# Altium PCB BDS_NBIOT.PcbDoc
Units mil, origin at the board's own origin, x right, y up, seen from the top; angles counter-clockwise.
Board outline 3780 x 2275 mil, 2 copper layers (Top Layer, Bottom Layer); 72 components, 60 nets, 272 pads, 41 vias.
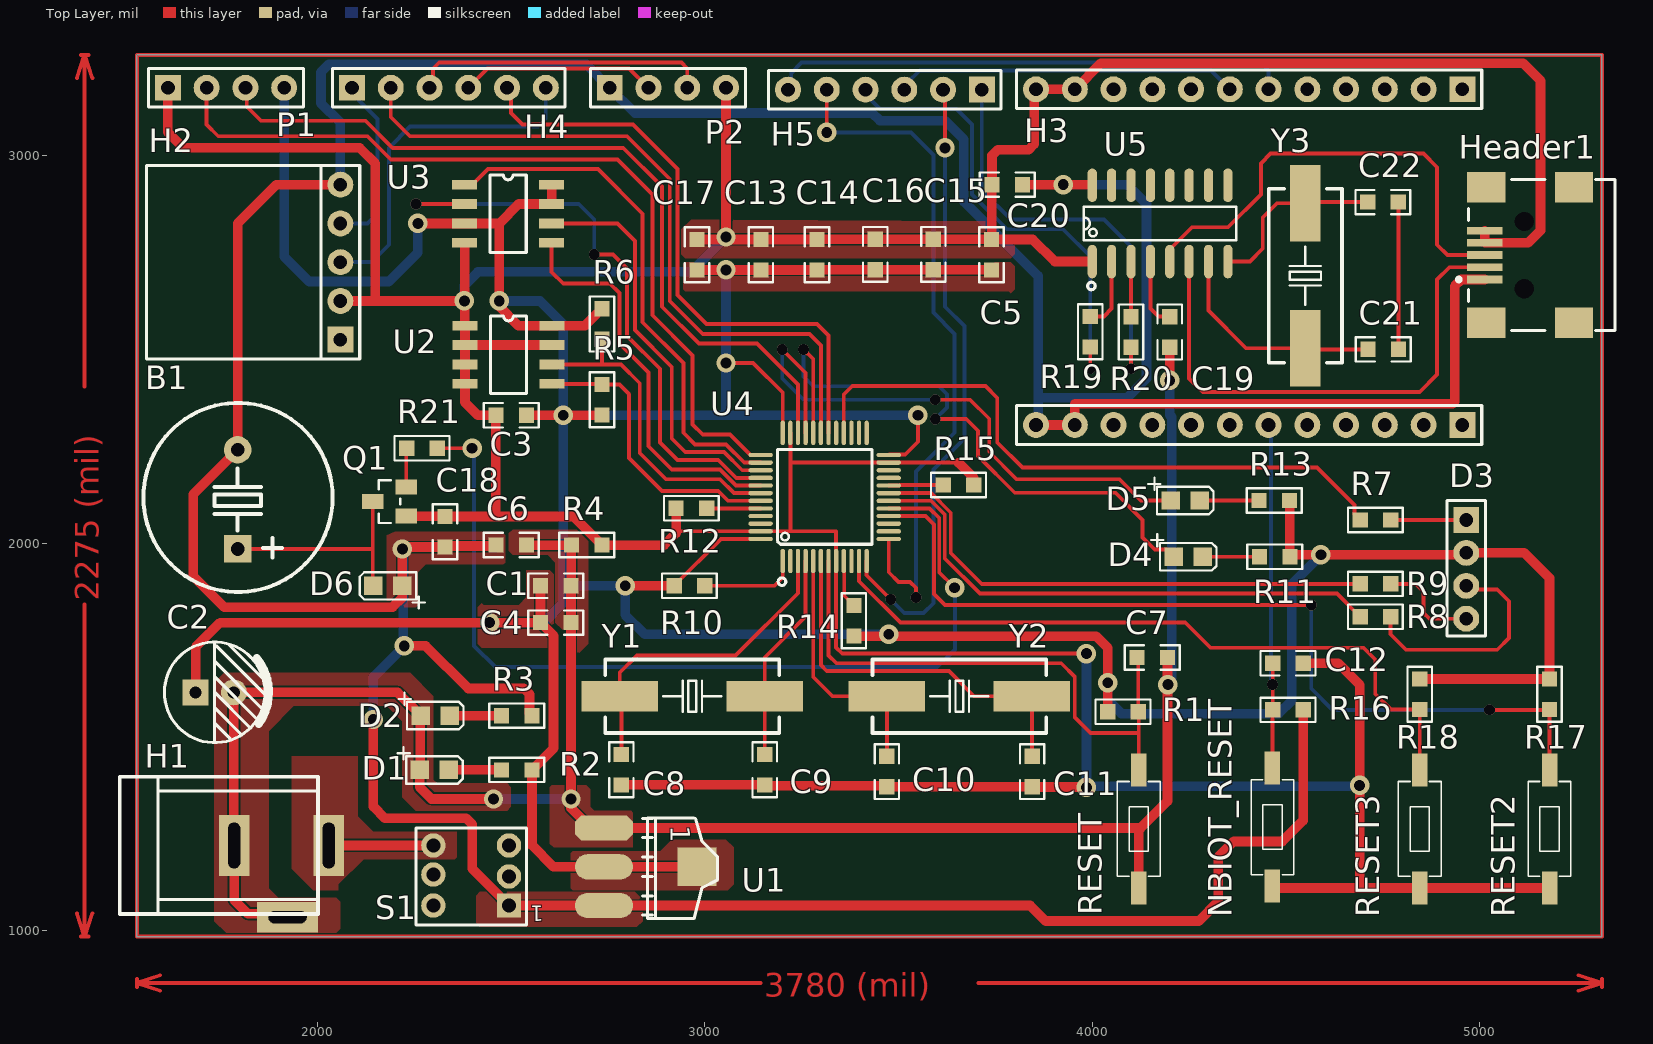
[diagram p0: Top Layer view]
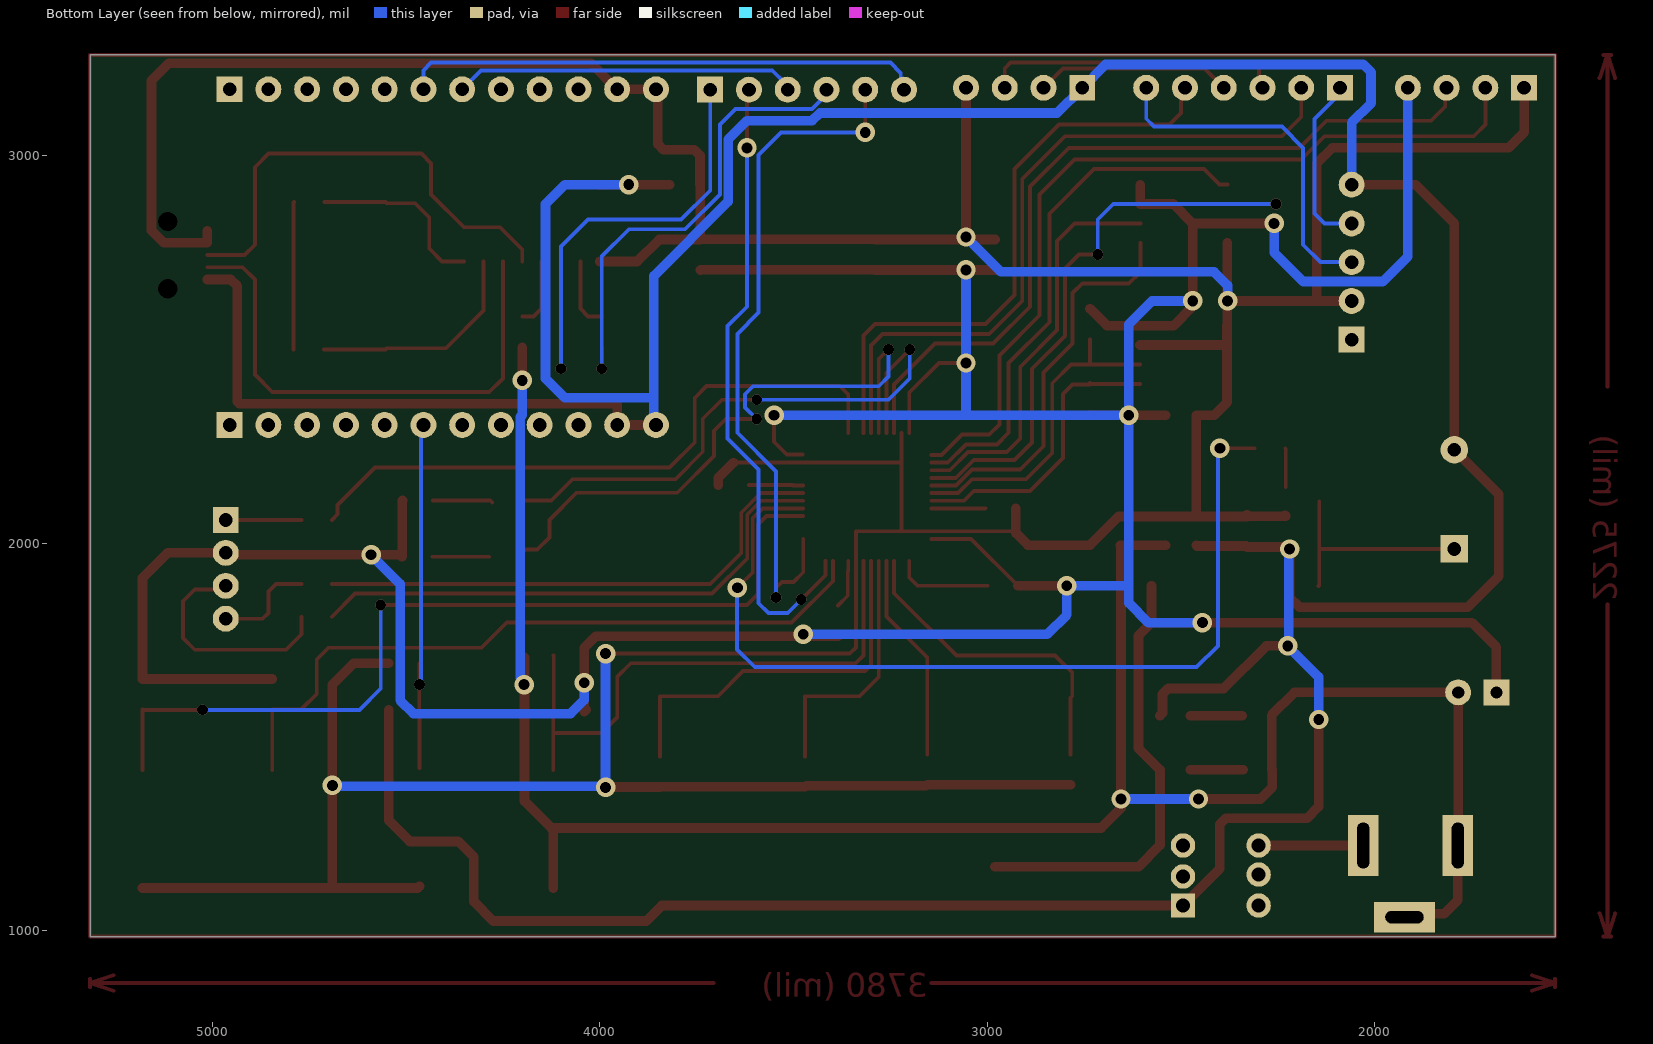
[diagram p1: Bottom Layer view, seen from below]

## Layer stack, top to bottom
Top Solder: solder mask 0.4, Solder Resist, Dk 3.5
Top Layer: signal copper 1.4
Dielectric 1: dielectric 12.6, FR-4, Dk 4.8
Bottom Layer: signal copper 1.4
Bottom Solder: solder mask 0.4, Solder Resist, Dk 3.5

## Board outline
1535,985 1535,3260 5315,3260 5315,985

## Design rules (kind name [scope] priority, off if disabled: settings)
Clearance [All] p1: gap=4 ignorepadtopadclearanceinfootprint=FALSE
PolygonConnect [All] p1: connectstyle=Direct reliefconductorwidth=10 reliefentries=4 polygonreliefangle="90 Angle" airgapwidth=10
RoutingVias [All] p1: holewidth=28 width=50 viastyle="Through Hole" minholewidth=28 minwidth=50 maxholewidth=28 maxwidth=50
SolderMaskExpansion [All] p1: expansion=4
Width Width_1 [InNetClass('POWER')] p1: maxlimit=30 minlimit=10 preferedwidth=25
Width [All] p2: maxlimit=10 minlimit=10 preferedwidth=10
30 further rules are at their usual default settings.

## Classes and differential pairs
net class POWER: AGND GND NetD1_1 NetD2_1 NetH1_1 VCC3.3 VCC5

## Components (designator, comment, footprint, x,y, rotation, side; value= is the part's Value field where it differs from the comment)
B1 "BEEP6.5mm" "BEEP 6.5x12x6" 1795,2112.95 r0 top
C1 "0.1uF" 0805C 2615.63,1890 r0 top
C2 "220uf" "CAP 2.5*6.3*11.2" 1735.79,1615 r0 top
C3 "0.1uf" 0805C 2500.63,2330 r0 top
C4 "104" 0805C 2615.63,1795 r180 top
C5 "0.1uf" 0805C 3740,2744.37 r270 top
C6 "104" 0805C 2500.63,1995 r180 top
C7 "Cap" 0805C 4155,1705 r180 top value=104
C8 "Cap" 0805C 2785,1415.63 r90 top value=15pF
C9 "Cap" 0805C 3155,1415.63 r90 top value=15pF
C10 "Cap" 0805C 3470,1410.63 r90 top value=22pF
C11 "Cap" 0805C 3845,1410.63 r90 top value=22pf
C12 "Cap" 0805C 4505,1690 r180 top value=104
C13 "Cap" 0805C 3145,2744.37 r270 top value=15pF
C14 "Cap" 0805C 3290,2744.37 r270 top value=15pF
C15 "Cap" 0805C 3590,2745 r270 top value=15pF
C16 "Cap" 0805C 3440,2745 r270 top value=15pF
C17 "Cap" 0805C 2980,2744.37 r270 top value=15pF
C18 "104" 0805C 2330,2029.37 r270 top
C19 "0.1uf" 0805C 4200,2545 r270 top
C20 "0.1uf" 0805C 3780.63,2925 r0 top
C21 "22pf" 0805C 4750.63,2500 r0 top value=0.1uf
C22 "22pf" 0805C 4750,2880 r0 top value=0.1uf
D1 "LED0" 0805D 2302.6,1415 r0 top
D2 "LED0" 0805D 2305,1555 r0 top
D3 "LEDFULL" LEDFULL 4965,1910 r270 top
D4 "LED0" 0805D 4247.6,1965 r0 top
D5 "LED0" 0805D 4240,2110 r0 top
D6 "Diode 1N4148" 0805D 2182.6,1889.8 r180 top
H1 "POWER" DC-005 1785.91,1220 r180 top
H2 "ATGM336H-5N" GPS 2060,2725 r90 top
H3 "WH-NB75" NBIOT 4410,2765 r90 top locked
H4 "Header6" HDR2.54-LI-6P 2340,3175 r0 top
H5 "Header6" HDR2.54-LI-6P 3465,3170 r180 top
Header1 "USB_MICRO" USB/SM0.8-6H5 5321.69,2743.39 r0 top
NBIOT_RESET "RESET" KEY 4605,1065 r90 top
P1 "ACIN" HDR2.54-LI-4P 1765,3175 r0 top
P2 "ACIN" HDR2.54-LI-4P 2905,3175 r0 top
Q1 "S8050" SOT23-3 2186.69,2107.4 r90 top
R1 "Res2" 0805R 4079.37,1565 r180 top value=10K
R2 "Res2" 0805R 2515,1415 r0 top value=10K
R3 "Res2" 0805R 2515,1555 r0 top value=4.7K
R4 "Res2" 0805R 2695.63,1995 r180 top value=0
R5 "4.7K" 0805R 2735,2370 r90 top value=330
R6 "4.7K" 0805R 2735,2565.63 r270 top value=330
R7 "1K" 0805R 4730.63,2060 r180 top value=330
R8 "1K" 0805R 4730.63,1810 r180 top value=330
R9 "1K" 0805R 4730.63,1895 r180 top value=330
R10 "Res2" 0805R 2960.63,1890 r180 top value=0R
R11 "1K" 0805R 4470.63,1965 r180 top value=330
R12 "Res2" 0805R 2965.63,2090 r0 top value=10K
R13 "1K" 0805R 4469.37,2110 r180 top value=330
R14 "Res2" 0805R 3385,1800 r270 top value=0R
R15 "Res2" 0805R 3655,2150 r0 top value=10K
R16 "Res2" 0805R 4505,1570 r0 top value=10K
R17 "10K" 0805R 5180,1610 r270 top value=330
R18 "10K" 0805R 4845,1610 r270 top value=330
R19 "330Ω" 0805R 3995,2545.63 r90 top value=330
R20 "330Ω" 0805R 4100,2545 r90 top value=330
R21 "1K" 0805R 2270.63,2244.8 r180 top
RESET "RESET" KEY 3980,1465 r270 top
RESET2 "RESET" KEY 5320,1060 r90 top
RESET3 "RESET" KEY 4985,1060 r90 top
S1 "SW DIP-3" Switch 2350,1165 r90 top
U1 "AMS1117-3.3" AMS1117 2740.06,1265.03 r270 top
U2 "AT24C16" SOP-8 2381.5,2561.06 r0 top
U3 "W25Q16" SOP-8 2380.59,2925 r0 top
U4 "STM32F103C8T6" SQFP7X7-48 3309.65,2119.21 r90 top
U5 "CH340G" SOP16 4175,2825 r0 top
Y1 "32.768M" "OSC HC-49SMD" 2967.99,1605 r180 top
Y2 "8M" "OSC HC-49SMD" 3657.01,1605 r180 top
Y3 "12MHz" "OSC HC-49SMD" 4550,2690 r270 top

## Footprints (in the part's own frame and the unit in brackets; to place one, negate y for a bottom-side part, rotate by r counter-clockwise, add the part's x,y. Pads: shape width x height; smd on the part's side, far side on the other; paste and mask are expansions set on the pad)
0805C [mm]
  rect 1x1 smd: 1(-1,0) 2(1,0)
  silkscreen extent -1.8,-0.8 1.8,0.8
0805D [mm]
  rect 1.2x1.2 smd: 1(0.95,0) 2(-0.95,0)
  silkscreen extent -2.42,-0.9 1.85,1.49
0805R [mm]
  rect 1x1 smd: 1(-1,0) 2(1,0)
  silkscreen extent -1.8,-0.8 1.8,0.8
AMS1117 [mil]
  oct 65x150 smd: 1(0.03,-0.06)
  oval 65x150 smd: 2(100.03,-0.06) 3(200.03,-0.06)
  rect 100x100 smd: 4(100.03,239.94)
  silkscreen extent -26,100 234,293
"BEEP 6.5x12x6" [mm] "6.5*12*6mm(脚距,直径,高度)"
  rect 1.8x1.8 hole 0.9: 1(0,-3.25)
  round 1.8 hole 0.9: 2(0,3.25)
  silkscreen extent -6.18,-6.07 6.22,6.32, body extent -6,-6 6,6, height 6.05
"CAP 2.5*6.3*11.2" [mm] "脚距2.5mm直径6.3mm高度11.2mm"
  rect 1.7x1.7 hole 0.8: 1(-1.25,0)
  round 1.7 hole 0.8: 2(1.25,0)
  silkscreen extent -3.3,-3.3 3.56,3.3, body extent -3.15,-3.15 3.16,3.15, height 11.23
DC-005 [mm] "5.5*2.1mm，DC30V,2.5A"
  rect 2x4 hole 0.8 slot 3 at 90 deg: 1(-6.2,0) 2(0,0)
  rect 4x2 hole 0.8 slot 2.5 at 0 deg: 3(-3.5,4.7)
  silkscreen extent -5.48,-4.5 7.5,4.5, body extent -6.55,-4.5 7.5,4.8, height 11.2
GPS [mm] "排母，5脚"
  rect 1.7x1.7 hole 0.9: 1(-5.08,0)
  round 1.7 hole 0.9: 2(-2.54,0) 3(0,0) 4(2.54,0) 5(5.08,0)
  silkscreen extent -6.35,-1.27 6.35,12.7, body extent -6.35,-1.27 6.35,1.27, height 8.5
HDR2.54-LI-4P [mm] "排针，4脚"
  rect 1.7x1.7 hole 0.9: 1(-3.81,0)
  round 1.7 hole 0.9: 2(-1.27,0) 3(1.27,0) 4(3.81,0)
  silkscreen extent -5.08,-1.27 5.08,1.27, body extent -5.08,-1.27 5.08,1.27, height 8.5
HDR2.54-LI-6P [mm] "排针，6脚"
  rect 1.7x1.7 hole 0.9: 1(-6.35,0)
  round 1.7 hole 0.9: 2(-3.81,0) 3(-1.27,0) 4(1.27,0) 5(3.81,0) 6(6.35,0)
  silkscreen extent -7.62,-1.27 7.62,1.27, body extent -7.62,-1.27 7.62,1.27, height 8.5
KEY [mil]
  rect 85x40 smd: 1(50,140) 2(355,140)
  silkscreen extent 80,85 325,195
LEDFULL [mm] "全彩LED"
  round 1.7 hole 0.9: 1(-1.651,0) 3(0.508,0) 4(2.667,0)
  rect 1.7x1.7 hole 0.9: 2(-3.81,0)
  silkscreen extent -5.08,-1.27 3.81,1.27
NBIOT [mm] "排母，12脚"
  rect 1.7x1.7 hole 0.9: 1(10.316,-13.843) 24(-11.684,-13.843)
  round 1.7 hole 0.9: 2(10.316,-11.303) 3(10.316,-8.763) 4(10.316,-6.223) 5(10.316,-3.683) 6(10.316,-1.143) 7(10.316,1.397) 8(10.316,3.937) 9(10.316,6.477) 10(10.316,9.017) 11(10.316,11.557) 12(10.316,14.097) 13(-11.684,14.097) 14(-11.684,11.557) 15(-11.684,9.017) 16(-11.684,6.477) 17(-11.684,3.937) 18(-11.684,1.397) 19(-11.684,-1.143) 20(-11.684,-3.683) 21(-11.684,-6.223) 22(-11.684,-8.763) 23(-11.684,-11.303)
  silkscreen extent -12.95,-15.11 11.59,15.37, body extent -12.95,-15.11 11.59,15.37, height 8.5
"OSC HC-49SMD" [mm]
  rect 5x2 smd: 1(-4.75,0) 2(4.75,0)
  silkscreen extent -5.7,-2.4 5.7,2.4, body extent -6.5,-2.32 6.5,2.33, height 4.63
SOP16 [mm]
  oval 0.6x2.2 smd: 1(-4.445,-2.5) 2(-3.175,-2.5) 3(-1.905,-2.5) 4(-0.635,-2.5) 5(0.635,-2.5) 6(1.905,-2.5) 7(3.175,-2.5) 8(4.445,-2.5) 9(4.445,2.5) 10(3.175,2.5) 11(1.905,2.5) 12(0.635,2.5) 13(-0.635,2.5) 14(-1.905,2.5) 15(-3.175,2.5) 16(-4.445,2.5)
  silkscreen extent -5,-4.35 5,1.1
SOP-8 [mil]
  rect 65x25 smd: 1(0,0) 2(0,-50) 3(0,-100) 4(0,-150) 5(224.41,-150) 6(224.41,-100) 7(224.41,-50) 8(224.41,0)
  silkscreen extent 65,-175 159,25
SOT23-3 [mm]
  rect 1x1.4 smd: 1(-0.95,-1.1) 2(0.95,-1.1) 3(0,1.1)
  silkscreen extent -1.4,-0.7 1.4,0.7
SQFP7X7-48 [mm]
  oval 1.6x0.28 smd: 1(-4.2,2.75) 2(-4.2,2.25) 3(-4.2,1.75) 4(-4.2,1.25) 5(-4.2,0.75) 6(-4.2,0.25) 7(-4.2,-0.25) 8(-4.2,-0.75) 9(-4.2,-1.25) 10(-4.2,-1.75) 11(-4.2,-2.25) 12(-4.2,-2.75) 25(4.2,-2.75) 26(4.2,-2.25) 27(4.2,-1.75) 28(4.2,-1.25) 29(4.2,-0.75) 30(4.2,-0.25) 31(4.2,0.25) 32(4.2,0.75) 33(4.2,1.25) 34(4.2,1.75) 35(4.2,2.25) 36(4.2,2.75)
  oval 0.28x1.6 smd: 13(-2.75,-4.2) 14(-2.25,-4.2) 15(-1.75,-4.2) 16(-1.25,-4.2) 17(-0.75,-4.2) 18(-0.25,-4.2) 19(0.25,-4.2) 20(0.75,-4.2) 21(1.25,-4.2) 22(1.75,-4.2) 23(2.25,-4.2) 24(2.75,-4.2) 37(2.75,4.2) 38(2.25,4.2) 39(1.75,4.2) 40(1.25,4.2) 41(0.75,4.2) 42(0.25,4.2) 43(-0.25,4.2) 44(-0.75,4.2) 45(-1.25,4.2) 46(-1.75,4.2) 47(-2.25,4.2) 48(-2.75,4.2)
  silkscreen extent -5.8,-3.1 3.1,3.1
Switch [mm] "自锁开关 8*8"
  rect 1.6x1.6 hole 0.9: 1(-2.54,-3.683)
  round 1.6 hole 0.9: 2(-2.54,1.27) 3(-0.635,-3.683) 4(-0.508,1.27) 5(1.397,-3.683) 6(1.397,1.27)
  silkscreen extent -3.81,-4.83 2.54,2.41
USB/SM0.8-6H5 [mm]
  rect 2.3x0.5 smd: 1(-7.85,-1.6) 2(-7.85,-0.8) 3(-7.85,0) 4(-7.85,0.8) 5(-7.85,1.6)
  rect 2.5x2 smd: 6(-7.75,4.45) 7(-1.996,4.45) 8(-7.75,-4.45) 9(-1.996,-4.45)
  round 0.6 hole 1.27 unplated: MH1(-5.25,2.2) MH2(-5.25,-2.2)
  silkscreen extent -9.67,-4.95 0.7,4.95

## Part data
B1: library part BEEP
C1: library part CAP, "Capacitor"
C2: library part "Cap Pol3", "Polarized Capacitor (Surface Mount)", LatestRevisionDate=29-May-2009, LatestRevisionNote="IPC-7351 Footprint Added.", PackageDescription="Chip Capacitor", PackageReference=C0805, Published=8-Jun-2000, Publisher="Altium Limited"
C3 C4 C5 C6 C19 C20 C21 C22: library part Cap, "Capacitor", LatestRevisionDate=17-Jul-2002, LatestRevisionNote="Re-released for DXP Platform.", PackageDescription="Radial Cap, Thru-Hole; 2 Leads; 0.3 in Pin Spacing", PackageReference=RAD-0.3, Published=8-Jun-2000, Publisher="Altium Limited"
C7 C8 C9 C10 C11 C12 C13 C14 C15 C16 C17: "Capacitor", LatestRevisionDate=17-Jul-2002, LatestRevisionNote="Re-released for DXP Platform.", PackageDescription="Radial Cap, Thru-Hole; 2 Leads; 0.3 in Pin Spacing", PackageReference=RAD-0.3, Published=8-Jun-2000, Publisher="Altium Limited"
C18: library part C
D1 D2 D4 D5: "Typical INFRARED GaAs LED", LatestRevisionDate=08-Jul-2005, LatestRevisionNote="Mech Layer 1 removed.", PackageDescription="LED; 2 Leads", PackageReference=LED-0, Published=8-Jun-2000, Publisher="Altium Limited"
D3: "全彩LED"
D6: "High Conductance Fast Diode", Code_JEDEC=DO-204-AH, ComponentLink1Description="Manufacturer Link", ComponentLink1URL=http://www.fairchildsemi.com/, ComponentLink2Description=Datasheet, ComponentLink2URL=http://www.fairchildsemi.com/ds/1N%2F1N4148.pdf, DatasheetVersion=1997, LatestRevisionDate=17-Jul-2002, LatestRevisionNote="Re-released for DXP Platform.", PackageDescription="Diode, Axial; Body 3.8 x 1.9 mm (LxDia. max), Lead Dia. 0.53 mm (max)", PackageReference=DO-35, Published=8-Jun-2000, Publisher="Altium Limited"
H1: library part DC_IN
H2: "GPS"
H3: "NBIOT模块"
H4 H5: "6P接线"
NBIOT_RESET RESET RESET2 RESET3: library part SW-PB
P1 P2: library part P4, "Header, 4-Pin", LatestRevisionDate=17-Jul-2002, LatestRevisionNote="Re-released for DXP Platform.", Publisher="Altium Limited"
Q1: library part NPN, "8050/BCW846/BCW847"
R1 R2 R3 R4 R10 R12 R14 R15 R16: "Resistor", LatestRevisionDate=17-Jul-2002, LatestRevisionNote="Re-released for DXP Platform.", PackageDescription="Axial Device, Thru-Hole; 2 Leads; 0.4 in Pin Spacing", PackageReference=AXIAL-0.4, Published=8-Jun-2000, Publisher="Altium Limited"
R5 R6 R7 R8 R9 R11 R13 R17 R18 R19 R20: library part Res2, "Resistor", Manufacturer="Generic Components", Class=Passive, Published=08/06/2000, Publisher="Altium Hobart Technology Centre", SubClass=Resistor
R21: library part R_1
S1: "DIP Switch, 3 Position, SPST", Code_JEDEC=MO-001-AM, LatestRevisionDate=17-Jul-2002, LatestRevisionNote="Re-released for DXP Platform.", PackageReference=DIP-6, Published=24-Mar-1999, Publisher="Altium Limited"
U2: "EEPROM"
U3: "串行FLASH"
Y1 Y2 Y3: library part XTAL, "Crystal Oscillator", LatestRevisionDate=17-Jul-2002, LatestRevisionNote="Re-released for DXP Platform.", Published=8-Jun-2000, Publisher="Altium Limited"
  Y1 Y2: PackageDescription="Crystal, Thru-Hole; 2 Leads; Body 3.1 x 8.2 mm (Dia.xH)", PackageReference=R38

## Via types
v1: diameter 50, hole 28, Top Layer to Bottom Layer, 28 vias
v2: diameter 28, hole 28, Top Layer to Bottom Layer, 13 vias

## Nets (pads, with @x,y where several pads share a name; then routed paths per layer and width w, separated by ;. In a path a pad name is that pad's centre, name@x,y a point inside that pad or via, vN(x,y) a via of type N, cw(c..) or ccw(c..) an arc to the next point about the centre after c; other vN are vias at no path point)
AGND: C3.1 C5.1 C8.1 C9.1 C10.1 C11.1 C12.1 C13.1 C14.1 C15.1 C16.1 C17.1 C18.1 C20.1 H2.2 H3.11 H3.12 Header1.4 Header1.5 NBIOT_RESET.1 P1.1 P2.4 Q1.1 R4.1 R12.1 R15.2 RESET2.1 RESET3.1 U2.1 U2.2 U2.3 U2.4 U2.7 U3.4 U4.8 U4.23 U4.35 U4.47 U5.1 | length 13553.4
  Top Layer w10: 2930.63,2030.63 U4.47 3220,2030.63 ; U4.35 3221.06,2205 ; 3655,2207.8 U4.23 3223.86,2207.8 3221.06,2205 ; v1(3985,1715) 3355,1715 3339.17,1730.83 U4.8 3339.17,2030 3338.54,2030.63 3220,2030.63 ; 3220,2030.63 3221.06,2031.69 3221.06,2205
  Top Layer w25: P1.1 1615,3060 1655,3020 2110,3020 2150,2980 2150,2630 2145,2625 ; H2.2 2145,2625 ; Q1.1@2231.77,2071.77 Q1.1 2230.63,2069.37 2325.83,2069.37 C18.1@2330,2073.54 ; C18.1 2465,2068.74 ; U3.4 v1@2380.59,2625 ; U2.7 U2.2 ; C8.1 C9.1 3157.5,1373.76 3467.5,1373.76 C10.1 C11.1 3845.63,1370.63 3984.37,1370.63 v1(3985,1370) ; R12.1 2926.26,2026.26 2895,1995 R4.1 2661.26,2068.74 2465,2068.74 ; C17.1 v1@3055,2783.74 ; P2.4 v1(3055,2790) v1@3055,2783.74 ; 3655,2207.8 3694.37,2168.43 R15.2 ; U5.1 3903.43,2726.57 3846.26,2783.74 C5.1 ; NBIOT_RESET.1 4470,1110 4690,1110 v1(4690,1375) 4690,1635 4635,1690 C12.1 ; 4695,1110 RESET3.1 RESET2.1 ; Header1.5 Header1.4 5124.88,2774.88 5156.5,2806.5 5156.5,3193.5 5111.5,3238.5 4022.36,3238.5 H3.11 H3.12 3850,3166.14 3850,3029.64 3835.36,3015 3755.9,3015 3741.26,3000.36 C20.1 3740.63,2924.37 3740.63,2784.37 C5.1 ; 2145,2625 v1(2380,2625) v1@2380.59,2625 ; v1@2380.59,2625 2380.59,2561.06 U2.1 U2.2 ; U2.2 U2.3 U2.4 2381.5,2363.5 2415,2330 C3.1 2461.26,2072.48 2465,2068.74 ; v1@3055,2783.74 C13.1 C14.1 3290.31,2784.06 3439.69,2784.06 C16.1 C15.1 3590.31,2784.06 3739.69,2784.06 C5.1
  Bottom Layer w25: v1(2380,2625) 2380,2665 2415,2700 2965,2700 v1(3055,2790) ; v1(3985,1715) v1(3985,1370) 3987.5,1372.5 4687.5,1372.5 v1(4690,1375)
GND: C1.2 C2.2 C4.1 C6.1 C7.1 C19.2 D1.2 D2.2 H1.2 H1.3 R4.2 RESET.2 U1.1 | length 5578.1
  Top Layer w25: H1.2 1785.91,1079.09 1821.34,1043.66 1915,1043.66 H1.3 ; H1.2@1790,1220 1785,1225 C2.2 2207.6,1615 2266.4,1556.2 2266.4,1416.2 D1.2 2265.2,1369.8 2295,1340 v1(2455,1340) ; C6.1 R4.2 2655.63,1994.37 2655.63,1890.63 C1.2 C4.1 v1(2655,1340) 2655,1316.43 2706.43,1265 U1.1 4125,1265 ; RESET.2 4120,1260 4125,1265 ; C7.1 4194.37,1334.37 4125,1265 ; v1(4200,2420) C19.2
  Bottom Layer w25: v1(2455,1340) v1(2655,1340) ; v1(4195,1635) 4195,1641.76 4204.96,1651.73 4204.96,2325.7 4200,2330.66 v1(4200,2420)
GPS_RXD1: H2.4 H4.1 | length 473
  Top Layer w10: H4.1@2090,3160 H4.1
  Bottom Layer w10: H2.4 2130,2825 2155.86,2850.86 2155.86,3094.14 2090,3160 H4.1
GPS_TXD1: H2.3 H4.6 | length 909.7
  Bottom Layer w10: H2.3 2140,2725 2185,2770 2185,3020 2240,3075 2570,3075 2590,3095 H4.6
NBIOT_RXD2: H3.6 H5.6 | length 1360.8
  Top Layer w10: H5.6@3215,3160 3210,3165 H5.6
  Bottom Layer w10: H5.6 3223.52,3178.52 3223.52,3213.52 3250,3240 4435,3240 4455,3220 H3.6
NBIOT_TXD2: H3.7 H5.3 | length 893.9
  Top Layer w10: H5.3 H5.3@3520,3165
  Bottom Layer w10: H5.3 3523.52,3178.52 3523.52,3188.52 3555,3220 4306.14,3220 H3.7
NetB1_1: B1.1 D6.1 Q1.3 | length 566.7
  Top Layer w10: B1.1 2143.39,1985 ; Q1.3 2143.39,1985 ; D6.1 2143.39,1891.61 2143.39,1985
NetC8_2: C8.2 U4.3 Y1.2 | length 840.3
  Top Layer w10: C8.2 2785,1600.99 Y1.2 2780.99,1665.99 2825,1710 3080,1710 3240.75,1870.75 U4.3
NetC9_2: C9.2 U4.4 Y1.1 | length 542.5
  Top Layer w10: C9.2 Y1.1 3155,1705 3260.43,1810.43 U4.4
NetC10_2: C10.2 U4.5 Y2.2 | length 664.5
  Top Layer w10: U4.5 3280.12,1654.88 3330,1605 Y2.2 C10.2
NetC11_2: C11.2 U4.6 Y2.1 | length 1001.5
  Top Layer w10: U4.6 3299.8,1685.2 3315,1670 3630,1670 3695,1605 Y2.1 3845,1604.01 C11.2
NetC12_2: C12.2 H3.19 NBIOT_RESET.2 R16.1 | length 944.4
  Top Layer w10: NBIOT_RESET.2 4465,1569.37 R16.1 C12.2
  Bottom Layer w10: H3.19 4461.56,2298.44 4461.56,1638.44 v2(4465,1635)
NetC19_1: C19.1 U5.4 | length 180.1
  Top Layer w10: U5.4 4150,2605 4170.63,2584.37 C19.1
NetC21_1: C21.1 U5.7 Y3.2 | length 579.3
  Top Layer w10: U5.7 4300,2600 4397.01,2502.99 Y3.2 4552.99,2500 C21.1
NetC21_2: C21.2 C22.2 | length 380.3
  Top Layer w10: C22.2 4790,2879.37 C21.2
NetC22_1: C22.1 U5.8 Y3.1 | length 471
  Top Layer w10: U5.8 4406.57,2726.57 4440,2760 4440,2840 4477.01,2877.01 Y3.1 4552.99,2880 C22.1
NetD1_1: D1.1 R2.1 | length 135.6
  Top Layer w25: D1.1 R2.1
NetD2_1: D2.1 R3.1 | length 133.2
  Top Layer w25: D2.1 R3.1
NetD3_2: D3.2 R7.1 | length 195
  Top Layer w10: R7.1 D3.2
NetD3_3: D3.3 R8.1 | length 600.6
  Top Layer w10: R8.1 4770,1765 4810,1725 5045,1725 5075,1755 5075,1850 5045,1880 4975,1880 D3.3
NetD3_4: D3.4 R9.1 | length 264.5
  Top Layer w10: R9.1 4835,1895 4855,1875 4855,1820 4870,1805 D3.4
NetD4_1: D4.1 R11.2 | length 146.3
  Top Layer w10: D4.1 R11.2
NetD5_1: D5.1 R13.2 | length 154.7
  Top Layer w10: D5.1@4277.4,2105 4282.4,2110 R13.2
NetH1_1: H1.1 S1.6 | length 270
  Top Layer w25: H1.1 S1.6
NetH4_3: H4.3 P2.3 | length 771.6
  Top Layer w10: H4.3 2298.52,3183.52 2298.52,3223.52 2315,3240 2940,3240 2955,3225 P2.3
NetH4_4: H4.4 P2.2 | length 506.4
  Top Layer w10: H4.4 2440,3225 2805,3225 P2.2
NetQ1_2: Q1.2 R21.2 | length 100.5
  Top Layer w10: Q1.2 2230,2243.54 R21.2
NetR10_1: R10.1 U4.1 | length 252.7
  Top Layer w10: R10.1 3180,1890 3201.38,1911.38 U4.1
NetR12_2: R12.2 U4.44 | length 139.4
  Top Layer w10: R12.2 3005.32,2089.68 U4.44
NetR14_1: R14.1 U4.9 | length 125.3
  Top Layer w10: U4.9 3358.86,1927.6 3360,1926.46 3360,1864.37 R14.1
NetR15_1: R15.1 U4.20 | length 141.2
  Top Layer w10: U4.20 3501.26,2148.74 3502.52,2150 R15.1
NetR19_2: R19.2 U5.2 | length 184.9
  Top Layer w10: R19.2 4030,2585 4050,2605 U5.2
NetR20_2: R20.2 U5.3 | length 142.2
  Top Layer w10: R20.2 U5.3
NRST: C7.2 R1.1 RESET.1 U4.7 | length 1484.2
  Top Layer w10: U4.7 3319.49,1710.51 3340,1690 3920,1690 3955,1655 3955,1550 3995,1510 4120,1510 ; C7.2@4119.37,1710 4118.74,1709.37 R1.1 4120,1563.74 4120,1510 ; RESET.1 4120,1510
PA1: R18.2 RESET3.2 U4.11 | length 1843.6
  Top Layer w10: U4.11 3398.23,1901.77 3505,1795 4240,1795 4305,1730 4700,1730 4730.31,1699.69 4730.31,1610.94 4770.63,1570.63 R18.2 RESET3.2
PA6: R17.2 RESET2.2 U4.16 | length 2299.4
  Top Layer w10: U4.16 3570,2070 3591.37,2048.63 3591.37,1868.63 3620,1840 v2(4565,1840) ; v2(5025,1570) 5179.37,1570 R17.2 RESET2.2
  Bottom Layer w10: v2(4565,1840) 4565,1625 4620,1570 v2(5025,1570)
PA7: R21.1 U4.17 | length 2384
  Top Layer w10: R21.1 2399.8,2244.8 v1(2400,2245) ; U4.17 3580.32,2089.68 3605.37,2064.63 3605.37,1924.63 3640,1890 v1@3650,1890
  Bottom Layer w10: v1(2400,2245) 2405,2240 2405,1735 2460,1680 3600,1680 3645.86,1725.86 3645.86,1884.14 v1(3645,1885)
PA11: D4.2 U4.32 | length 1588.1
  Top Layer w10: v2(3255,2500) 3280.12,2474.88 U4.32 ; v2(3595,2320) 3675,2320 3705,2290 3705,2225 3800,2130 4060,2130 4130,2060 4130,2015 4161.38,1983.62 4191.57,1983.62 D4.2
  Bottom Layer w10: v2(3255,2500) 3255,2430 3280,2405 3604.14,2405 3625,2384.14 3625,2350 v2(3595,2320)
PA12: D5.2 U4.33 | length 1498.3
  Top Layer w10: v2(3200,2500) 3260.43,2439.57 U4.33 ; v2(3595,2370) 3685,2370 3734.14,2320.86 3734.14,2235.86 3805,2165 4070,2165 4125,2110 D5.2
  Bottom Layer w10: v2(3200,2500) 3200,2425 3255,2370 v2(3595,2370)
PA15: U3.1 U4.38 | length 1363.4
  Top Layer w10: U3.1 2400.59,2925 2440.59,2965 2725,2965 2840,2850 2840,2570 2945,2465 2945,2285 2975,2255 3055,2255 3102.2,2207.8 U4.38
PB0: R8.2 U4.18 | length 1406.9
  Top Layer w10: U4.18 3584.36,2109.37 3619.37,2074.37 3619.37,1960.63 3710,1870 4631.26,1870 R8.2
PB1: R9.2 U4.19 | length 1373.9
  Top Layer w10: U4.19 3584.48,2129.06 3635,2078.53 3635,1975 3715,1895 R9.2
PB3: U3.6 U4.39 | length 1046.2
  Top Layer w10: U3.6 2775,2825 2820,2780 2820,2550 2915,2455 2915,2270 2950,2235 3050,2235 3096.89,2188.11 U4.39
PB4: U3.2 U4.40 | length 1573
  Top Layer w10: v2(2255,2875) U3.2 ; v2(2715,2745) 2763.2,2745 2800,2708.2 2800,2535 2885,2450 2885,2260 2930,2215 3035,2215 3081.57,2168.43 U4.40
  Bottom Layer w10: v2(2255,2875) 2675,2875 2715,2835 v2(2715,2745)
PB5: U3.5 U4.41 | length 1030.1
  Top Layer w10: U3.5 2605,2700 2635,2670 2755,2670 2780,2645 2780,2515 2855,2440 2855,2250 2915,2190 3040,2190 3081.26,2148.74 U4.41
PB6: R6.2 U2.6 U4.42 | length 846.5
  Top Layer w10: U2.6 2735,2461.06 ; R6.2 2735,2461.06 ; U4.42 3075.94,2129.06 3040,2165 2900,2165 2832.5,2232.5 2832.5,2412.5 2783.94,2461.06 2735,2461.06
PB7: R5.2 U2.5 U4.43 | length 760
  Top Layer w10: U2.5 2732.32,2411.06 R5.2@2735,2413.74 ; R5.2 2780,2409.37 2805,2384.37 2805,2220 2890,2135 3035,2135 3060.63,2109.37 U4.43
PB15/SDL: R7.2 U4.28 | length 1665.3
  Top Layer w10: U4.28 3358.86,2383.86 3380.86,2405.86 3724.14,2405.86 3755,2375 3755,2260 3820,2195 4580,2195 4676.57,2098.43 4676.57,2074.69 R7.2
RXD1: H4.2 U4.31 | length 1839.3
  Top Layer w10: H4.2 2190,3100 2240,3050 2800,3050 2910,2940 2910,2625 2995,2540 3270,2540 3299.8,2510.2 U4.31
RXD2: H5.5 U4.13 | length 1822.7
  Top Layer w10: v1@3315,3050 v1(3315,3060) H5.5 ; U4.13 3475,1925 3500,1900 3530,1900 3545,1885 v2(3545,1860)
  Bottom Layer w10: v1(3315,3060) 3531.92,3060 3590,3001.92 3590,2595 3645,2540 3645,2285 3545,2185 v2(3545,1860)
SWDCLK: P1.2 U4.37 | length 2164.5
  Top Layer w10: P1.2 1715,3080 1745,3050 2130,3050 2190,2990 2775,2990 2865,2900 2865,2588.03 2969.02,2484.02 2969.02,2305.98 2995,2280 3065.79,2280 3118.31,2227.48 U4.37
SWDIO: P1.3 U4.34 | length 2075.6
  Top Layer w10: P1.3 1818.46,3171.54 1818.46,3126.54 1855,3090 2125,3090 2195,3020 2790,3020 2890,2920 2890,2610 2985,2515 3135,2515 3240.55,2409.45 3240.55,2284.76 U4.34
TXD1: H4.5 U4.30 | length 1567.9
  Top Layer w10: H4.5 2500,3165 2500,3110 2530,3080 2815,3080 2930,2965 2930,2640 3005,2565 3290,2565 3319.49,2535.51 U4.30
TXD2: H5.2 U4.12 | length 1670.3
  Top Layer w10: U4.12 3417.91,1917.09 v2(3480,1855) ; H5.2 3620,3165 v1(3620,3020) 3620,3050
  Bottom Layer w10: v2(3480,1855) 3515,1820 3565,1820 3590,1845 3590,2190 3670,2270 3670,2560 3620,2610 v1(3620,3020)
UD+: Header1.3 U5.5 | length 1218.8
  Top Layer w10: U5.5 4200,2758.07 4256.93,2815 4350,2815 4435,2900 4435,2980 4460,3005 4855,3005 4890,2970 4890,2770 4916.61,2743.39 Header1.3
UD-: Header1.2 U5.6 | length 1355.6
  Top Layer w10: U5.6 4250,2425 4285,2390 4845,2390 4890,2435 4890,2680 4921.89,2711.89 Header1.2
USB_RXD2: H5.4 R19.1 | length 1231.4
  Top Layer w10: H5.4@3415,3160 3420,3165 H5.4 ; v2(3995,2450) R19.1
  Bottom Layer w10: H5.4 3415,3157.35 3452.35,3120 3650,3120 3690,3080 3690,2900 3780,2810 3925,2810 3995,2740 v2(3995,2450)
USB_TXD2: H5.1 R20.1 | length 1082.8
  Top Layer w10: H5.1 H5.1@3720,3165 ; v2(4100,2450) R20.1
  Bottom Layer w10: H5.1 3715,2910 3790,2835 4030,2835 4100,2765 v2(4100,2450)
VCC3.3: C1.1 C2.1 C3.2 C4.2 C5.2 C13.2 C14.2 C15.2 C16.2 C17.2 D3.1 P1.4 R1.2 R2.2 R5.1 R6.1 R10.2 R11.1 R13.1 R14.2 R17.1 R18.1 U1.2 U1.4 U2.8 U3.3 U3.7 U3.8 U4.24 U4.36 U4.48 | length 12409.7
  Top Layer w10: R10.2 3042.2,2010.94 U4.48 ; v1(3055,2465) 3125,2465 3201.38,2388.62 U4.36 ; U4.24@3476.74,2229.22 3517.59,2229.22 3550,2261.63 v1(3550,2330)
  Top Layer w25: C2.1 1686.57,1731.57 1750,1795 v1(2445,1795) C4.2 ; v1(2260,2825) U3.3 2470,2825 ; C3.2 2540.32,2330.32 2734.68,2330.32 R5.1 ; C1.1 C4.2 ; U3.8 U3.7 2520,2875 2470,2825 ; R6.1 2691.06,2561.06 U2.8 2518.94,2561.06 2470,2610 v1(2470,2625) 2470,2825 ; v1(2795,1890) R10.2 ; U1.4 U1.2 2610,1165 2554.37,1220.63 R2.2 2610,1470.63 2610,1761.26 C4.2 ; C17.2 v1(3055,2705) C13.2 C14.2 3290.31,2705.31 3439.69,2705.31 C16.2 C15.2 3590.31,2705.31 3739.69,2705.31 C5.2 ; R14.2@3385,1760 3475,1760 4010,1760 4040,1730 v1(4040,1640) 4040,1575 4035,1570 R1.2 ; R13.1 4509.37,2109.37 4509.37,1965.63 R11.1 4515,1970 v1(4590,1970) 4960,1970 D3.1 5115,1975 5180,1910 R17.1 R18.1
  Bottom Layer w25: P1.4 1915,2739.64 1979.64,2675 2185,2675 2260,2750 v1(2260,2825) ; v1(2445,1795) 2585,1795 2635,1845 2635,1885 ; v1(2470,2625) 2575,2625 2635,2565 v1(2635,2330) ; v1(3055,2705) v1(3055,2465) 3055,2330 ; v1(3475,1765) 2845,1765 2795,1815 v1(2795,1890) 2640,1890 2635,1885 ; v1(3550,2330) 3055,2330 ; v1(4040,1640) 4040,1595 4075,1560 4480.36,1560 4515,1594.64 4515,1895 v1(4590,1970) ; 2635,1885 v1(2635,2330) ; v1(2635,2330) 3055,2330
VCC5: B1.2 C6.2 C18.2 C20.2 D6.2 H2.5 H3.13 H3.14 Header1.1 P2.1 R3.2 R16.2 S1.1 U1.3 U5.16 | length 11973.1
  Top Layer w25: H2.5 1895,2925 1795,2825 B1.2 1680,2125.91 1680,1915 1760,1835 2195,1835 2220,1860 D6.2 v1(2220,1985) 2225,1990 C18.2 2332.5,1992.5 2458.76,1992.5 C6.2 ; v1@2145,1550 v1(2145,1545) 2145,1320 2175,1290 2385,1290 2400,1275 2400,1160 S1.1 U1.3 3840,1065 3880,1025 4275,1025 4325,1075 4325,1190 4365,1230 4490,1230 4544.37,1284.37 R16.2 ; v1@2220,1735 v1(2225,1735) 2280,1735 2390,1625 2533.17,1625 2547.81,1610.36 2547.81,1561.56 R3.2 ; C20.2 v1(3925,2925) 3999.31,2925 4000,2924.31 U5.16 ; H3.13 H3.14 3955,2360 4930,2360 4935,2365 4935,2663.1 4952.3,2680.4 Header1.1
  Bottom Layer w25: H2.5 2060,3085 2010,3135 2010,3215.32 2029.68,3235 2695,3235 P2.1 2820,3110 3431.95,3110 3451.95,3090 3620,3090 3668.5,3041.5 3668.5,2881.5 3860.36,2689.64 3860.36,2375.36 ; v1(2145,1545) 2145,1655 v1(2225,1735) 2222.5,1737.5 2222.5,1982.5 v1(2220,1985) ; H3.13 3860.36,2310.36 3860.36,2375.36 ; v1(3925,2925) 4090,2925 4140,2875 4140,2425 4090.36,2375.36 3860.36,2375.36
pads on no net: H2.1 H3.1 H3.2 H3.3 H3.4 H3.5 H3.8 H3.9 H3.10 H3.15 H3.16 H3.17 H3.18 H3.20 H3.21 H3.22 H3.23 H3.24 Header1.6 Header1.7 Header1.8 Header1.9 Header1.MH1 Header1.MH2 S1.2 S1.3 S1.4 S1.5 U4.2 U4.10 U4.14 U4.15 U4.21 U4.22 U4.25 U4.26 U4.27 U4.29 U4.45 U4.46 U5.9 U5.10 U5.11 U5.12 U5.13 U5.14 U5.15
copper on no net: | length 17627.3
  Top Layer w10: 1380,1045 1400,985 ; 1380,3200 1400,3260 ; 1390,985 1410,985 ; 1390,3260 1410,3260 ; 1400,1841.59 1400,985 ; 1400,2403.41 1400,3260 ; 1420,1045 1400,985 ; 1420,3200 1400,3260 ; 1535,855 1535,875 ; 1595,845 1535,865 ; 1595,885 1535,865 ; 3144.09,865 1535,865 ; 3705.91,865 5315,865 ; 5255,845 5315,865 ; 5255,885 5315,865 ; 5315,855 5315,875 ; 1535,985 1535,3260 5315,3260 5315,985 1535,985

## Polygon pours and split planes (outlines as drawn)
VCC3.3 on Top Layer "Top Layer-VCC3.3" (solid, pour order 66): 2950,2725 3790,2725 3800,2715 3800,2655 3790,2645 3785,2650 2950,2650 2945,2655 2945,2720
AGND on Top Layer "Top Layer-AGND" (solid, pour order 64): 2965,2835 2940,2810 2940,2745 2950,2735 3790,2735 3800,2745 3800,2825 3790,2830 3785,2830
VCC5 on Top Layer "Top Layer-VCC5" (solid, pour order 62): 2200,2030 2475,2030 2485,2020 2485,1950 2480,1945 2280,1945 2260,1925 2260,1840 2255,1835 2195,1835 2180,1850 2180,2020
VCC3.3 on Top Layer "Top Layer-VCC3.3 1" (solid, pour order 60): 2540,1930 2600,1930 2610,1920 2610,1740 2600,1730 2425,1730 2415,1740 2415,1835 2425,1845 2430,1840 2520,1840 2540,1860
GND on Top Layer "Top Layer-GND" (solid, pour order 58): 2495,2025 2505,2035 2670,2035 2700,2005 2700,1740 2675,1715 2635,1715 2635,1775 2615,1795 2615,1950 2595,1970 2505,1970 2495,1980
VCC5 on Top Layer "Top Layer-VCC5 1" (solid, pour order 56): 2420,1100 2820,1100 2840,1080 2840,1025 2825,1010 2420,1010 2410,1020 2410,1090
no net on Top Layer "Top Layer-No Net 2" (solid, pour order 54): 2420,1110
VCC3.3 on Top Layer "Top Layer-VCC3.3 2" (solid, pour order 52): 2660,1205 2885,1205 2915,1235 3055,1235 3075,1215 3075,1120 3060,1105 2660,1105 2655,1110 2655,1200
GND on Top Layer "Top Layer-GND 1" (solid, pour order 50): 2605,1375 2695,1375 2705,1365 2705,1320 2715,1310 2810,1310 2815,1305 2815,1215 2610,1215 2600,1225 2600,1370
GND on Top Layer "Top Layer-GND 2" (solid, pour order 48): 2050,1085 1900,1085 1875,1110 1875,1515 1940,1580 2180,1580 2220,1540 2220,1345 2255,1310 2490,1310 2500,1320 2500,1370 2490,1380 2310,1380 2300,1390 2300,1605 2240,1665 1760,1665 1735,1640 1735,1025 1765,995 2050,995 2060,1005 2060,1075
NetH1_1 on Top Layer "Top Layer-NetH1_1" (solid, pour order 46): 1935,1450 2105,1450 2105,1295 2145,1255 2360,1255 2360,1190 2355,1185 2120,1185 2055,1120 2055,1105 1990,1105 1935,1160
no net on Top Layer "Top Layer-No Net 3" (solid, pour order 44): 1995,1310
no net on Top Layer "Top Layer-No Net" (solid, pour order 26): 2735,1425
no net on Top Layer "Top Layer-No Net 1" (solid, pour order 2): 1445,1500

## Other copper
Top Layer:
  text "2275 (mil)" at 1435.99,1851.59 h60 r90
  text "3780 (mil)" at 3154.09,829.01 h60

## Text inside footprints (layer, text, board x,y; h text height)
S1: Top Overlay "1" at 2585,1065 h40 r180
U1: Top Overlay "1" at 2913,1271 h50 r270